# EAGLE board untitled (EAGLE 6.2)
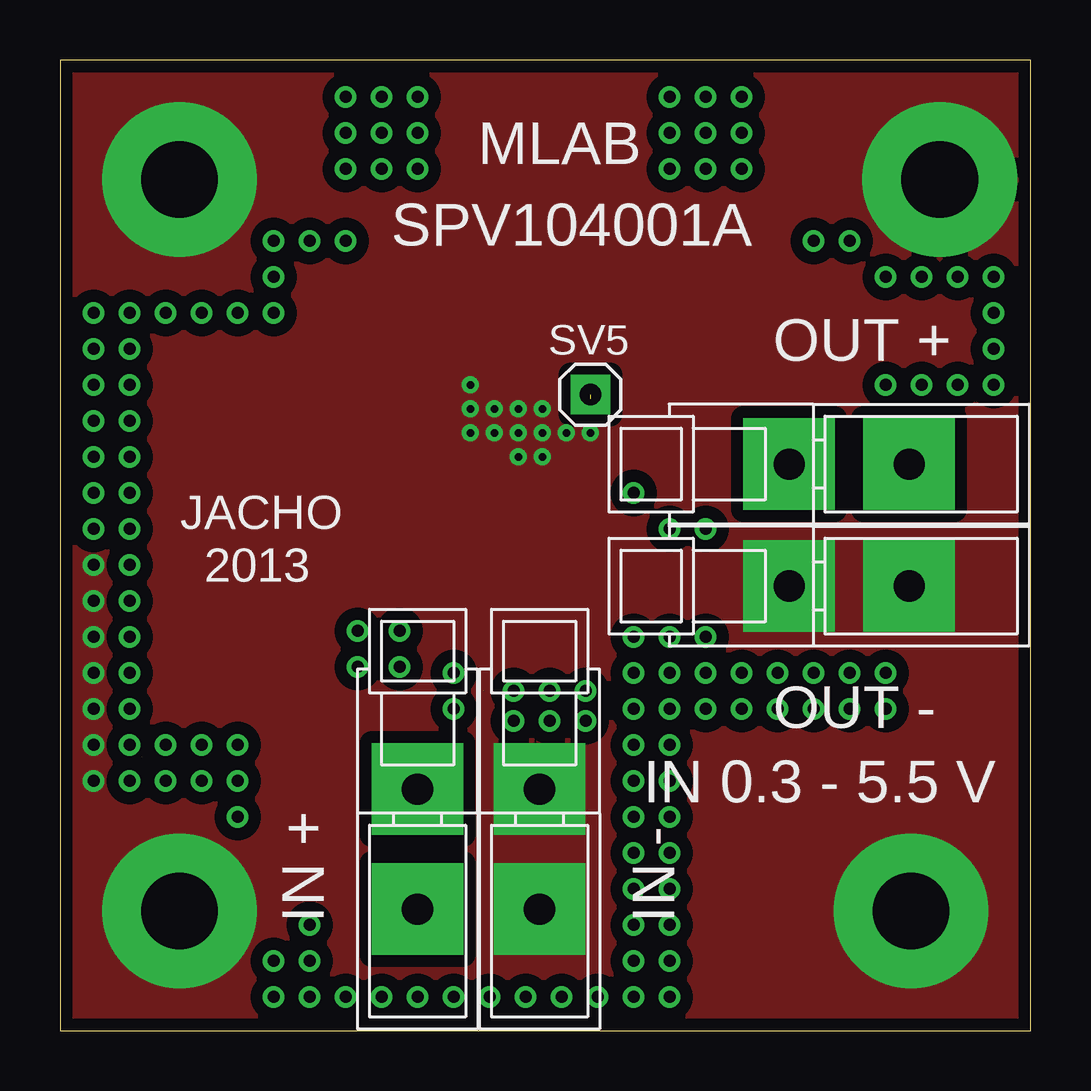
[diagram p0: board, top side]
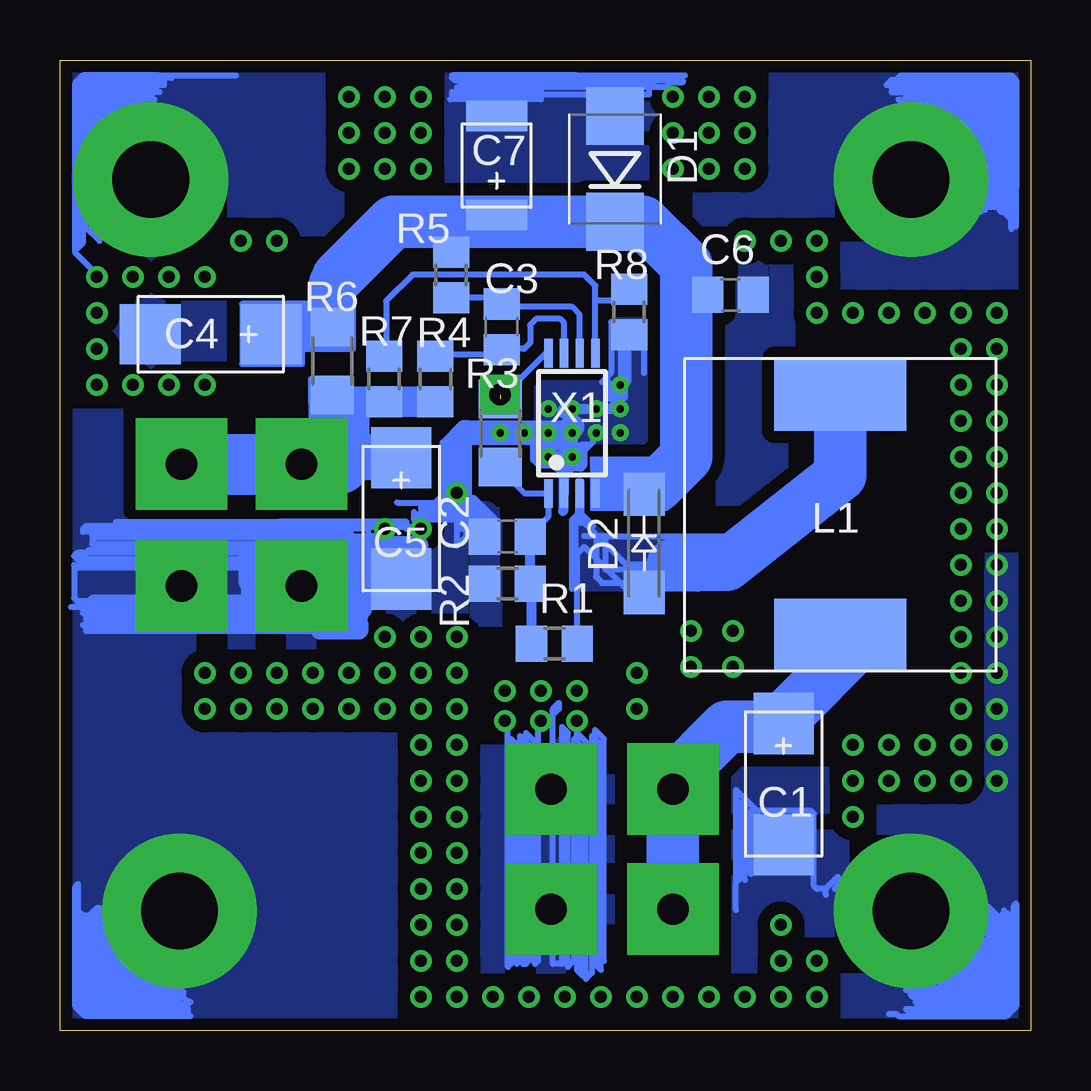
[diagram p1: board, bottom side, seen from below]

Size 40.44 x 40.44 mm. Coordinates in mm from the lower left corner, seen from the top.
Outline: 0,0 40.44,0 40.44,40.44 0,40.44 0,0
Copper layers (1*16): Top 0.035mm / dielectric 1mm / Bottom 0.035mm
Design rules: minimum track width 12mil, minimum drill 24mil, track to track 20mil, track to pad 20mil, pad to pad 20mil, via to via 20mil, smd to smd 8mil, copper to edge 20mil, drill to drill 70mil, minimum pad ring 10mil, minimum via ring 8mil, stop-mask expansion 5mil, vias tented up to drill 0mil, thermal gap 0mil

## Footprints (pad centres in the part's own frame; a part is rotated, then mirrored left to right if it is on the bottom)
C = smd 2.55 x 2.5: + 2.525,0; - -2.525,0
C0805 = smd 1.3 x 1.5: 1 -0.95,0; 2 0.95,0
B = smd 1.27 x 2.54: + 2.223,0; - -1.905,0
SMB = smd 2.4 x 2.4: A 2.2,0; K -2.2,0
SMA = smd 1.8 x 1.7: A -2.05,0; K 2.05,0
DE1205-10 = smd 3 x 5.5: P$1 -5,0; P$2 5,0
0805 = smd 1.3 x 1.5: 1 -0.95,0; 2 0.95,0
1206 = smd 1.6 x 1.803: 1 -1.422,0; 2 1.422,0
WAGO256 = drill 1.3 pad 3.81 square: 1 2.54,0; A1 -2.46,0
MA01-1 = drill 0.889 pad 1.651 square: 1 0,0
TSSOP8 = smd 0.35 x 1.2: 1 -0.975,-2.925; 2 -0.325,-2.925; 3 0.325,-2.925; 4 0.975,-2.925; 5 0.975,2.925; 6 0.325,2.925; 7 -0.325,2.925; 8 -0.975,2.925
SROUB3M = drill 3.2 pad 6.452: P$1 0,0

## Placement (x,y rotation side)
C1  47uF  [C]  10.29,10.27 90 bottom
C2  1nF  [C0805]  21.8,20.58 180 bottom
C3  1uF  [C0805]  22.04,29.32 90 bottom
C4  47uF  [C]  34.16,29.01 0 bottom
C5  47uF  [C]  26.22,21.34 90 bottom
C6  [C0805]  12.5,30.65 0 bottom
C7  [B]  22.25,36.2 270 bottom
D1  P6SMB6.8A-LF  [SMB]  17.32,35.9 90 bottom
D2  [SMA]  16.1,20.3 90 bottom
L1  10uH  [DE1205-10]  7.92,21.49 90 bottom
R1  1k  [0805]  19.84,16.12 0 bottom
R2  DNM  [0805]  21.8,18.62 0 bottom
R3  0R  [1206]  22.1,24.9 90 bottom
R4  1k  [0805]  24.8,27.15 270 bottom
R5  1k  [0805]  24.14,31.48 90 bottom
R6  0R  [1206]  29.1,27.9 270 bottom
R7  [0805]  26.94,27.15 270 bottom
R8  [0805]  16.73,29.94 90 bottom
SV1  [WAGO256]  14.9,7.52 90 top
SV2  [WAGO256]  19.98,7.52 90 top
SV3  [WAGO256]  32.92,23.6 180 top
SV4  [WAGO256]  32.92,18.52 180 top
SV5  [MA01-1]  22.1,26.5 0 top
X1  [TSSOP8]  19.11,25.3 0 bottom
X2  SROUB3M  [SROUB3M]  36.66,35.46 0 top
X3  SROUB3M  [SROUB3M]  35.46,4.98 0 top
X4  SROUB3M  [SROUB3M]  4.98,35.46 90 top
X5  SROUB3M  [SROUB3M]  4.98,4.98 0 top

## Library data of the parts
C1-C7 = moje_C
D1 D2 = moje_diody
L1 = moje_L
R1-R8 = moje_R
SV1-SV4 = moje_konektory
SV5 = moje_hrebinky
X1 = moje_io
X2-X5 = moje

## Nets
GND: C1.- C2.2 C4.- C5.- C6.2 C7.- D1.A R2.1 R8.1 SV2.1 SV2.A1 SV4.1 SV4.A1 X1.2 X2.P$1 X3.P$1 X4.P$1 X5.P$1
N$1: C1.+ L1.P$1 SV1.1 SV1.A1
N$2: R3.2 SV5.1 X1.8
N$3: C2.1 R1.1 R2.2 R3.1 X1.1
N$4: C3.1 R4.1 X1.7
N$5: C4.+ C6.1 C7.+ D1.K D2.K R5.2 R6.1 X1.4
N$6: D2.A L1.P$2 R1.2 X1.3
N$8: C5.+ R4.2 R6.2 R7.2 SV3.1 SV3.A1
N$9: C3.2 R5.1 X1.6
VCTRL: R7.1 R8.2 X1.5

## Tracks (layer width: path | path; a pad name or v marks a point on that pad's centre or on a via)
GND  (via drill 0.3, 0.5)
  Bottom 0.254: 31.1,20.77 39.48,20.77 39.48,20.9 39.35,21.02 30.35,21.02 30.22,20.9 30.85,20.9 31.22,20.52 38.98,20.52 39.1,20.65 39.1,20.27 30.85,20.27 | 30.6,20.27 30.85,20.27 | 30.85,20.27 31.22,19.9 39.73,19.9 39.85,19.77 39.48,19.77 39.23,20.02 30.6,20.02 30.35,19.77 30.85,19.77 31.1,19.52 39.6,19.52 39.73,19.65 31.1,19.65 30.97,19.52 | 17.77,2.9 17.77,12.15 18.15,12.53 18.15,2.77 17.9,2.52 17.9,11.9 18.27,12.28 18.27,2.4 18.52,2.15 18.52,12.03 18.9,12.4 18.9,2.52 18.65,2.27 18.65,11.78 19.02,12.15 19.02,2.9 19.27,2.65 19.27,12.4 19.52,12.65 19.52,2.77 19.9,2.77 19.9,13.4 19.65,13.65 19.65,13.4 20.52,12.53 20.52,2.9 20.65,2.77 20.65,12.03 21.02,12.4 21.02,2.9 21.15,2.77 21.02,2.77 20.77,3.02 20.77,11.78 21.27,12.28 21.27,2.9 21.4,2.77 21.4,11.9 21.65,12.15 21.65,2.77 21.77,2.65 21.77,12.78 | 30.85,19.27 39.73,19.27 39.85,19.4 39.85,18.02 39.73,17.9 39.23,17.9 | 38.85,17.9 32.5,17.9 28.6,17.9 28.47,18.02 | 31.22,18.02 39.1,18.02 39.23,17.9 | 39.23,17.9 38.85,17.9 | 38.85,17.9 38.6,17.65 39.1,17.65 39.23,17.77 30.72,17.77 30.6,17.65 39.48,17.65 | 39.98,17.65 39.48,17.65 | 39.48,17.65 39.35,17.52 30.97,17.52 30.72,17.27 39.23,17.27 39.48,17.52 39.48,17.4 39.1,17.02 29.72,17.02 29.6,17.15 39.35,17.15 39.35,16.65 29.47,16.65 29.35,16.77 39.35,16.77 39.48,16.9 | 11.03,9.15 9.15,9.15 9.03,9.03 9.03,6.03 8.9,5.9 8.53,5.9 | 11.03,9.15 11.4,9.15 11.9,9.65 | 11.9,9.65 12.28,10.03 12.28,6.15 | 12.28,5.03 12.28,6.15 | 12.28,6.15 12.15,6.28 12.15,6.53 | 12.15,9.53 12.15,6.53 | 12.15,6.53 11.9,6.28 11.9,6.78 | 11.9,9.65 11.9,6.78 | 11.9,6.78 11.65,6.53 11.65,9.15 11.53,9.15 11.4,9.03
  Bottom 0.254: 8.53,5.65 8.53,5.9 | 8.53,5.9 8.03,6.4 8.03,6.03 8.15,5.9 | C1.- 10.29,8.42 11.03,9.15 | 18.22,24.65 18.22,24.52 18.6,24.15 18.6,23.52 18.72,23.4 19.1,23.4 19.35,23.15 19.47,23.15 19.6,23.15 19.6,23.27 19.85,23.52 20.47,23.52 20.72,23.77 20.72,24.77 20.6,24.77 19.72,23.9 | 19.72,23.9 19.35,23.52 | 19.35,23.52 19.22,23.4 18.97,23.65 18.85,23.65 | 18.85,23.65 18.72,23.52 18.72,24.15 18.47,24.4 18.72,24.4 18.97,24.15 18.97,24.02 18.85,23.9 | 16.1,27.4 16.1,28.65 16.22,28.77 | 17.47,29.52 17.47,27.4 17.72,27.15 | 17.85,27.02 17.72,27.15 | 17.47,26.4 17.47,26.9 17.72,27.15 | 18.97,23.77 18.85,23.77 18.85,23.65 | 19.35,23.52 19.22,23.52 | 19.1,23.65 18.97,23.77 | 18.97,23.77 18.97,23.9 | 18.97,24.52 18.97,23.9 | 18.97,23.9 19.1,23.77 | 19.1,24.4 v19.1,23.9 | v19.1,23.9 19.1,23.77 | 19.1,23.77 19.22,23.65 | 19.22,23.65 20.35,23.65 20.6,23.9 20.6,24.02 | 20.6,24.02 20.6,24.15 20.47,24.27 20.35,24.27 | 19.47,24.27 20.35,24.27 | 20.35,24.27 20.6,24.02 | 20.6,24.02 19.47,24.02 19.35,24.15 19.47,24.15 19.72,23.9 | 19.72,23.9 v20.1,23.9 20.47,23.9 20.6,23.77 | 19.22,23.65 19.22,24.4 | 19.22,24.4 20.6,24.4 | 19.1,25.15 v19.1,24.9 v19.1,23.9 | v19.1,23.9 19.1,23.65 | 19.1,23.65 19.22,23.52 | 19.22,23.52 19.22,23.65 | 19.22,24.4 19.22,25.52 19.47,25.77 | 19.6,25.77 19.47,25.77 | 19.43,25.81 19.47,25.77 | 15.53,39.65 18.9,39.65 18.9,39.8 | 18.9,39.8 14.4,39.8 | 18.9,39.8 24.1,39.8 24.1,39.7 24,39.7 24,39.6 14.5,39.6 14.5,39.5 15.1,39.5 15.1,39.3 23.9,39.3 23.9,39.2 23.8,39.2 | 23.8,39.2 23.7,39.2 | 23.7,39.2 23.7,39.5 15.9,39.5 | 15.7,39.5 15.9,39.5 | 15.9,39.5 15.9,39 24.1,39 24.1,39.1 23.8,39.1 23.8,39.2 | 23.7,39.2 20.4,39.2 20.4,38.8 24.2,38.8
  Bottom 0.254: 31.1,21 25.9,21 25.9,20.9 26,20.9 26,21.2 31.3,21.2 | 38.1,21.2 31.3,21.2 | 31.3,21.2 31.3,20.9 | 31.3,20.7 31.3,20.6 27.6,20.6 | 27.2,20.6 27.6,20.6 | 27.6,20.6 27.6,20.9 31.3,20.9 | 31.3,20.9 31.3,20.7 | 31.3,20.7 28.3,20.7 28.3,20.5 31.9,20.5 31.9,20.3 27.2,20.3 27.2,20.2 32.2,20.2 32.2,20.1 27.4,20.1 27.4,19.9 32.3,19.9 32.3,19.7 27.4,19.7 27.4,19.5 | 27.4,19.5 27.4,19.4 32.2,19.4 32.2,19.3 32.1,19.3 32.1,19.5 27.5,19.5 | 27.4,19.5 27.5,19.5 | 27.5,19.5 27.5,19.1 27.6,19.1 | 27.6,19.1 31.6,19.1 | 31.8,19.1 31.6,19.1 | 31.6,19.1 31.6,19.3 27.6,19.3 27.6,19.1 | 27.6,19.1 27.6,17.4 | 39.2,31.8 39.8,32.4 39.8,39.5 39.5,39.8 | 35.8,39.7 36.2,39.7 | 36.2,39.7 36.3,39.8 | 36.3,39.8 33.1,39.8 | 36.3,39.8 39.5,39.8 | 39.5,39.8 39.5,32.8 39.7,32.6 39.7,39.4 39.6,39.5 39.4,39.5 | 39.4,39.5 36.2,39.5 36.1,39.4 36.1,39.6 36.2,39.7 | 36.2,39.7 39.2,39.7 39.4,39.5 | 39.4,39.5 39.4,39.1 | 39.4,38.6 39.4,33.5 38.8,32.9 38.8,38.4 | 38.8,38.4 38.8,39.3 38.7,39.4 | 38.7,39.4 36.2,39.4 | 38.7,39.4 39.2,39.4 39.3,39.3 39.3,39.1 | 39.3,39 39.3,38.8 | 39.3,38.8 39.3,37.4 38.3,38.4 36.9,38.4 36.5,38.8 36.8,38.8 | 39.3,38.8 36.8,38.8 | 36.8,38.8 36.6,39 39.3,39 | 39.3,39 39.3,39.1 | 39.3,39.1 39.1,39.3 36.5,39.3 36.3,39.1 39.4,39.1 | 39.4,39.1 39.4,38.6 | 39.4,38.6 38.9,38.6 | 37.1,38.6 38.9,38.6 | 38.9,38.6 39.2,38.3 39.2,38 39.1,37.9 39.1,38.1 38.8,38.4 | 38.8,38.4 38.5,38.4 39.2,37.7 | 5.8,39.3 5.8,39.4 5.4,39.8 0.8,39.8 0.6,39.6 0.6,35.2 | 0.6,35.2 0.6,35.1 | 0.6,35.1 0.7,35 0.7,39.4 0.9,39.6 5.8,39.6 6,39.4 1,39.4 0.8,39.2 0.8,35.3 0.9,35.2 0.9,39 1.1,39.2 5.7,39.2 5.8,39.1 1.4,39.1 1.1,38.8 1.1,38.4 | 1.1,35.4 1.1,38.4
  Bottom 0.254: 1.1,38.4 1.6,38.9 | 1.6,38.9 1.4,38.9 1.3,38.8 5,38.8 5.2,39 1.7,39 1.6,38.9 | 1.6,38.9 1.6,38.8 1.5,38.7 5.4,38.7 5.5,38.8 4.2,38.8 3.9,38.5 1.3,38.5 1.2,38.4 3.4,38.4 3.5,38.3 1.4,38.3 1.3,38.2 1.3,37.8 | 1.3,37.8 1.3,37.2 | 1.3,37.2 1.3,35.6 1.4,35.5 | 1.4,35.5 1.4,38 1.6,38.2 3.2,38.2 2.8,37.8 2.6,37.8 | 1.3,37.8 2.6,37.8 | 2.6,37.8 2.8,38 1.6,38 1.5,37.9 1.5,35.6 1.7,35.4 | 1.7,35.4 1.7,37.6 2.5,37.6 2.6,37.7 2.6,37.6 2.2,37.2 1.3,37.2 | 1.3,37.2 1.6,37.5 2.1,37.5 2.2,37.4 1.9,37.4 1.9,36.5 1.8,36.4 1.8,36.8 2.1,37.1 2.1,36.9 2,36.8 2,38.1 1.1,39 1.6,39 1.7,38.9 | 0.6,33.5 0.6,35.1 | 0.6,35.2 0.8,35 0.8,33.8 | 0.8,33.4 0.8,33.8 | 0.8,33.8 1.1,34.1 1.1,35.2 | 1.1,35.3 1.1,35.2 | 1.1,35.2 0.9,35 0.9,34.2 1,34.1 1.2,34.1 1.3,34.2 1.3,35.5 1.4,35.5 | 1.4,35.5 1.5,35.4 1.5,34.3 1.7,34.3 1.7,34.4 | 1.7,35.4 1.7,34.8 | 1.7,34.5 1.7,34.4 | 1.7,34.4 1.9,34.2 1.9,34.6 1.7,34.8 | 1.7,34.8 1.7,34.5 | 1.7,34.5 2.1,34.1 | 5.9,0.7 5.6,0.7 5.5,0.6 1,0.6 | 1,0.6 0.7,0.9 | 0.7,0.9 0.7,5.2 0.6,5.3 0.6,1 0.7,0.9 | 1,0.6 1,0.9 0.9,1 0.9,4.8 1,4.9 1,1 1.3,0.7 5,0.7 5.2,0.9 1.3,0.9 1.1,1.1 1.1,4.9 | 1.1,5 1.1,4.9 | 1.1,4.9 1.3,4.7 1.3,1 1.9,1 | 1.9,1 4.6,1 4.8,1.2 1.7,1.2 | 1.7,1.2 1.5,1.2 1.4,1.3 1.4,4.8 1.6,5 | 1.6,5 1.8,5.2 1.8,1.1 | 1.8,1.1 1.9,1 | 1.8,1.1 1.7,1.2 | 1.7,1.2 1.7,4.9 1.6,5 | 1.6,5 1.6,1.5 1.5,1.4 4.9,1.4 5,1.5 2,1.5 1.9,1.6 1.9,3.7 2,3.8 2,1.8 2.1,1.7 4.2,1.7 | 5.2,1.7 4.2,1.7 | 4.2,1.7 4.1,1.8 2.3,1.8 2.2,1.9 2.2,3.2 | 2.2,3.4 2.2,3.2 | 2.2,3.2 2.4,3 | 2.4,3 2.5,2.9 | 2.5,2.9 2.5,2 2.3,2 2.3,2.9 2.4,3 | 2.5,2.9 2.7,2.7 2.7,1.9 3.7,1.9 3.8,2 3,2 2.9,2.1 2.9,2.4 | 2.9,2.6 2.9,2.4 | 2.9,2.4 3.1,2.2 3.3,2.2 3.4,2.1
  Bottom 0.254: 35,0.6 39.4,0.6 39.8,1 39.8,6 39.7,6.1 39.7,5 39.5,4.8 39.5,1.7 | 39.5,1.7 39.5,1.2 39.7,1 39.7,4.5 39.4,4.8 39.1,4.8 | 39.1,4.8 38.9,5 | 38.8,5.1 38.8,4.3 38.6,4.1 38.8,4.1 | 38.8,4.1 39.3,4.6 39,4.6 39,4.1 38.9,4 38.9,5 | 38.9,5 38.8,5.1 | 38.8,5.1 38.9,5.1 39.3,4.7 39.3,1.5 | 39.3,1.3 39.3,1.1 | 39.3,0.9 39.3,0.8 39.4,0.8 39.6,1 39.5,1 39.4,1.1 39.4,1 39.3,0.9 | 39.3,0.9 39.2,0.8 35.1,0.8 35.1,0.9 35.3,1.1 39.3,1.1 | 39.3,1.1 39.3,0.9 | 39.3,0.9 35.3,0.9 35,1.2 35.1,1.2 35.4,1.5 39.3,1.5 | 39.3,1.5 39.3,1.3 | 39.3,1.3 35.5,1.3 35.3,1.5 35.3,1.6 35.4,1.7 39.2,1.7 | 39.5,1.7 39.2,1.7 | 39.2,1.7 39.1,1.8 39.1,4 | 39.1,4.8 39.1,4 | 39.1,4 38.9,3.8 38.9,1.7 39,1.6 38.9,1.6 38.7,1.8 38.7,2.1 | 38.7,2.2 38.7,4.1 38.8,4.2 | 38.8,4.2 38.8,4.1 | 38.8,4.1 38.5,3.8 38.5,3.7 | 38.5,3.6 38.5,2 38.6,1.9 36.8,1.9 | 36.3,1.9 36.8,1.9 | 36.8,1.9 37.2,2.3 38.6,2.3 38.7,2.2 | 38.7,2.2 38.7,2.1 | 38.7,2.1 38.6,2 37.3,2 37.3,2.2 38.7,2.2 | 38.7,2.2 38.8,2.1 38.5,2.1 38.2,2.4 38.2,3.3 38.3,3.4 38.3,2.5 38.4,2.4 37.8,2.4 37.7,2.5 38.1,2.9 38.1,2.6 38,2.5 37.6,2.5 37.6,2.6 38.1,3.1 38.1,3 37.1,2 37.1,2.1 38.4,3.4 38.4,3.5 38.5,3.6 | 38.5,3.6 38.5,3.7 | 38.5,3.7 38.8,4 38.8,4.1 | 38.8,4.2 38.7,4.3 38.7,4.5 39.4,4.5 39.7,4.8 | 23.4,24.6 23.4,22.2 23.2,22.2 22.3,21.3 22.6,21.3 23.2,21.9 23.2,21.7 22.9,21.4 23.4,21.4 23.4,25.3 23.7,25.3 24.5,24.5 24.5,22.3 24.8,22 24.6,22 24.3,22.3 | 24.3,22.3 24.3,24.4 23.7,25 23.7,24.7 24.1,24.3 24.1,22.4 23.9,22.4 | 23.9,22.4 23.9,22.8 | 23.9,22.8 23.9,24.3 23.7,24.5 23.7,22.4 23.8,22.3 23.7,22.3 | 23.7,22.3 23.5,22.5 23.5,24.6 23.6,24.7 | 26.4,22 24.7,22 24.6,22.1 | 24.6,22.1 23.9,22.8
  Bottom 0.254: 23.9,22.4 23.9,20.2 23.5,20.6 23.5,21 | 23.5,21.4 23.5,22.2 | 23.5,22.4 23.5,22.2 | 23.5,22.2 23.3,22 23.3,21.5 24,21.5 | 24.3,21.5 25.6,21.5 25.7,21.6 25.7,21.3 23.6,21.3 23.5,21.4 | 23.5,21.4 23.5,21 | 23.5,21 23.6,20.9 23.6,21 23.8,21.2 23.8,21 23.7,20.9 23.7,22.3 | 23.7,22.3 23.8,22.4 24.2,22.4 | 24.2,22.4 24.3,22.3 | 24.3,22.3 24.3,21.5 | 24.3,21.5 24,21.5 | 24,21.5 24,22.2 24.2,22.4 | 24.2,22.4 24.2,22 | 24.2,22 24.2,21.9 24.1,21.8 24.4,21.8 | 25.4,21.8 24.4,21.8 | 24.4,21.8 24.2,22 | 24.2,22 24.5,22 | 24.5,22 24.6,22.1 | 24.5,22 24.2,21.7 25.4,21.7
  Bottom 0.406: 19.35,24.9 19.43,24.81 X1.2 19.43,23.11 19.47,23.15 | 19.35,25.9 v19.1,25.9 v18.1,25.9 17.47,25.9 16.97,26.4 16.97,28.77 | 16.97,28.77 16.72,29.02 | 16.97,28.77 16.22,28.77 | 16.97,28.77 16.97,28.9 16.85,29.02 16.85,27.02 17.47,26.4
  Bottom 0.61: 19.43,25.81 19.35,25.9
  Bottom 0.813: 25.5,20.2 28,20.2 28,20 32.6,20 32.6,18.7 26.9,18.7 26.9,18.6 32.5,18.6 32.5,17.9 27.5,17.9 27.5,18 28,18 28,17.3 29.8,17.3 29.8,17.2 29.6,17.2 29.6,16.7 28,16.7 28,16.9
  Bottom 1.016: 23.35,24.9 v22.1,24.9 v21.1,24.9 v20.1,24.9 19.35,24.9 19.1,25.15
  other vias: 17.1,26.9 17.1,25.9 17.1,24.9 18.1,24.9 20.1,25.9 1.4,10.4 1.4,11.9 1.4,13.4 1.4,14.9 1.4,16.4 1.4,17.9 1.4,19.4
  pour Bottom: -0.1,41.9 -0.35,41.9 -0.35,-0.1 41.52,0.02 40.65,41.65 -0.1,41.65
  pour Top: -0.1,-0.23 40.27,-0.23 40.52,0.02 40.52,40.4 -0.1,40.4 -0.23,41.77 -0.23,-0.1
GND1  (via drill 0.5)
  other vias: 1.4,20.9 1.4,22.4 1.4,23.9 1.4,25.4 1.4,26.9 1.4,28.4 1.4,29.9
GND2  (via drill 0.5)  (1 unrouted)
  other vias: 2.9,10.4 2.9,11.9 2.9,13.4 2.9,14.9 2.9,16.4 2.9,17.9 2.9,19.4 18.9,14.15 18.9,12.9 20.4,14.15 21.9,14.15 20.4,12.9 21.9,12.9 16.4,13.4 16.4,14.9 14.15,15.15 12.4,16.65 14.15,16.65 12.4,15.15
GND3  (via drill 0.5)
  other vias: 2.9,20.9 2.9,22.4 2.9,23.9 2.9,25.4 2.9,26.9 2.9,28.4 2.9,29.9 4.4,29.9 5.9,29.9 7.4,29.9 8.9,29.9 8.9,31.4 8.9,32.9 10.4,32.9 11.9,32.9 14.9,35.9 14.9,37.4 14.9,38.9 13.4,38.9 13.4,37.4 13.4,35.9 11.9,35.9 11.9,37.4 11.9,38.9 25.4,38.9 25.4,37.4 25.4,35.9 26.9,35.9 26.9,37.4 26.9,38.9 28.4,38.9 28.4,37.4 28.4,35.9 34.4,31.4 31.4,32.9 32.9,32.9 35.9,31.4 37.4,31.4 38.9,31.4 38.9,29.9 38.9,28.4 38.9,26.9 37.4,26.9 35.9,26.9 34.4,26.9 23.9,16.4 25.4,16.4 26.9,16.4 26.9,14.9 25.4,14.9 23.9,14.9 23.9,13.4 25.4,13.4 26.9,13.4 28.4,13.4 28.4,14.9 29.9,14.9 29.9,13.4 31.4,14.9 32.9,14.9 31.4,13.4 32.9,13.4 34.4,13.4 34.4,14.9 23.9,11.9 23.9,10.4 23.9,11.9 23.9,8.9 23.9,7.4 23.9,5.9 23.9,4.4 23.9,2.9 25.4,11.9 25.4,10.4 25.4,8.9 25.4,7.4 25.4,5.9 25.4,4.4 25.4,2.9 13.4,1.4 14.9,1.4 17.9,1.4 16.4,1.4 19.4,1.4 20.9,1.4 23.9,1.4 22.4,1.4 25.4,1.4 7.4,11.9 7.4,10.4 7.4,8.9 10.4,4.4 10.4,2.9 8.9,2.9 8.9,1.4 10.4,1.4 11.9,1.4 25.4,20.9 26.9,20.9 23.9,22.4 5.9,11.9 4.4,11.9 4.4,10.4 5.9,10.4
N$1
  Bottom 2.184: SV1.A1 SV1.1 14.89,10.41 12.65,12.65 10.65,12.65 10.4,12.9 10.39,12.9 | 10.39,12.9 C1.+ | 10.39,12.9 10.39,12.91 6.9,16.4 7.83,16.4 L1.P$1
N$2  (1 unrouted)
  Bottom 0.254: X1.8 20.2,28.22 R3.2
N$3
  Bottom 0.254: 20.85,20.65 20.1,21.4 X1.1 21.07,22.38 22.1,23.4 R3.1
  Bottom 0.406: 22.1,23.65 R3.1 | 20.85,20.65 C2.1 R2.2 20.79,18.56 R1.1
N$4
  Bottom 0.254: X1.7 19.43,29.48 19.6,29.65 20.6,29.65 20.85,29.4 20.85,28.65 21.1,28.4 21.85,28.4 22.1,28.15 | 22.1,28.15 24.75,28.15 R4.1 | 22.1,28.15 22.06,28.15 C3.1
N$5
  Bottom 0.254: C4.+ 31.71,29.01 32.1,29.4 | 16.35,22.65 17.85,22.65 X1.4
  Bottom 0.813: R5.2 24.04,33.51 23.85,33.7 | D2.K 16.1,22.4 16.35,22.65 | C7.+ 23.12,33.98 23.4,33.7 | C6.1 13.6,30.65 14.35,31.4
  Bottom 1.93: R6.1 29.1,29.4 | 29.1,29.4 29.1,31.15 28.85,31.4 | 29.1,29.4 31.24,29.4 C4.+
  Bottom 2.184: 16.35,22.65 15.6,22.65 14.35,23.9 14.35,31.4 14.35,31.9 16.15,33.7 D1.K 23.4,33.7 23.85,33.7 26.55,33.7 28.85,31.4
N$6
  Bottom 0.254: 18.1,20.65 16.85,19.4 14.9,19.4 14.6,19.4 13.97,20.02 14.1,20.15 13.97,20.15 14.22,20.4 14.47,20.4 | 18.79,21.33 18.85,21.4 | 18.85,21.52 18.85,22.9 18.72,22.9 18.72,21.52 | R1.2 18.89,19.86 18.6,20.15 16.85,18.4 13.85,18.4 14.1,18.65 17.85,18.65 18.1,18.9 18.1,20.65 | X1.3 18.79,21.33 | 18.79,21.33 18.1,20.65 | 18.85,21.15 18.85,21.4 | 18.72,21.52 18.72,21.15 | 18.22,21.02 18.72,21.52 | 18.72,21.52 18.85,21.52 | 18.85,21.52 19.1,21.27 19.1,20.9 | 18.85,21.4 18.85,21.52 | 18.85,18.4 19.1,18.4 19.1,20.9 | 19.1,20.9 18.97,21.02 18.97,20.02 | 15,19.2 17.7,19.2 17.7,20.6 | 17.7,20.6 18.6,20.6 | 17.7,20.6 12.2,20.6 12.2,20.4
  Bottom 2.184: L1.P$2 7.92,23.13 12.65,19.4 14.9,19.4
  pour Bottom: 18.85,21.65 17.6,20.4 14.35,20.4 14.1,20.15 14.1,18.4 18.85,18.4 19.1,18.65 19.1,21.4
N$7
  Bottom 0.406: 19.47,23.77 19.47,21.65
N$8
  Bottom 0.254: 29.97,26.15 29.6,26.15 29.43,26.15 R6.2 | 29.97,26.15 29.97,24.52 | 29.97,26.15 29.97,27.15
  Bottom 0.61: 28.47,25.77 28.47,25.85 R6.2 | 29.6,24.4 29.6,26.15
  Bottom 1.27: R4.2 R7.2 28.82,26.2 R6.2
  Bottom 1.93: C5.+ 28.52,23.9 28.52,25.73 28.47,25.77
  Bottom 2.54: SV3.A1 SV3.1 28.79,23.63 28.52,23.9
N$9
  Bottom 0.254: X1.6 18.79,29.83 19.1,30.15 21.96,30.15 C3.2 22.3,30.53 R5.1 23.88,30.07
N$10
  Bottom 0.254: 0.7,34.7 0.7,34.9 0.6,35
N$11  (1 unrouted)
N$12
  Bottom 0.254: 30.47,28.4 28.22,28.4 28.22,30.9
N$13
  Bottom 0.254: 29.97,30.27 32.85,30.27 32.85,27.77 30.35,27.77 30.35,28.52 | 28.35,28.52 30.35,28.52 | 30.35,28.52 30.6,28.52
VCTRL
  Bottom 0.254: X1.5 18.13,30.43 | 26.6,28.1 R7.1 26.9,28.1 26.85,28.15 26.85,30.4 25.75,31.5 18.6,31.5 18.13,31.04 18.13,30.43 | 18.13,30.43 17.18,30.43 R8.2
(copper drawn outside any net)
  shapes: Bottom area x1

## Text on the board
tPlace: MLAB | SPV104001A | OUT + | JACHO | 2013 | OUT - | IN 0.3 - 5.5 V | IN + | IN -